# Altium PCB PCB.PcbDoc
Units mil, origin at the board's own origin, x right, y up, seen from the top; angles counter-clockwise.
Board outline 2700 x 1000 mil, 4 copper layers (L1, L2, L3, L4), stack 18.929 mil thick; 64 components, 76 nets, 299 pads, 83 vias.
Unrouted connection lines stored in the file: 45.
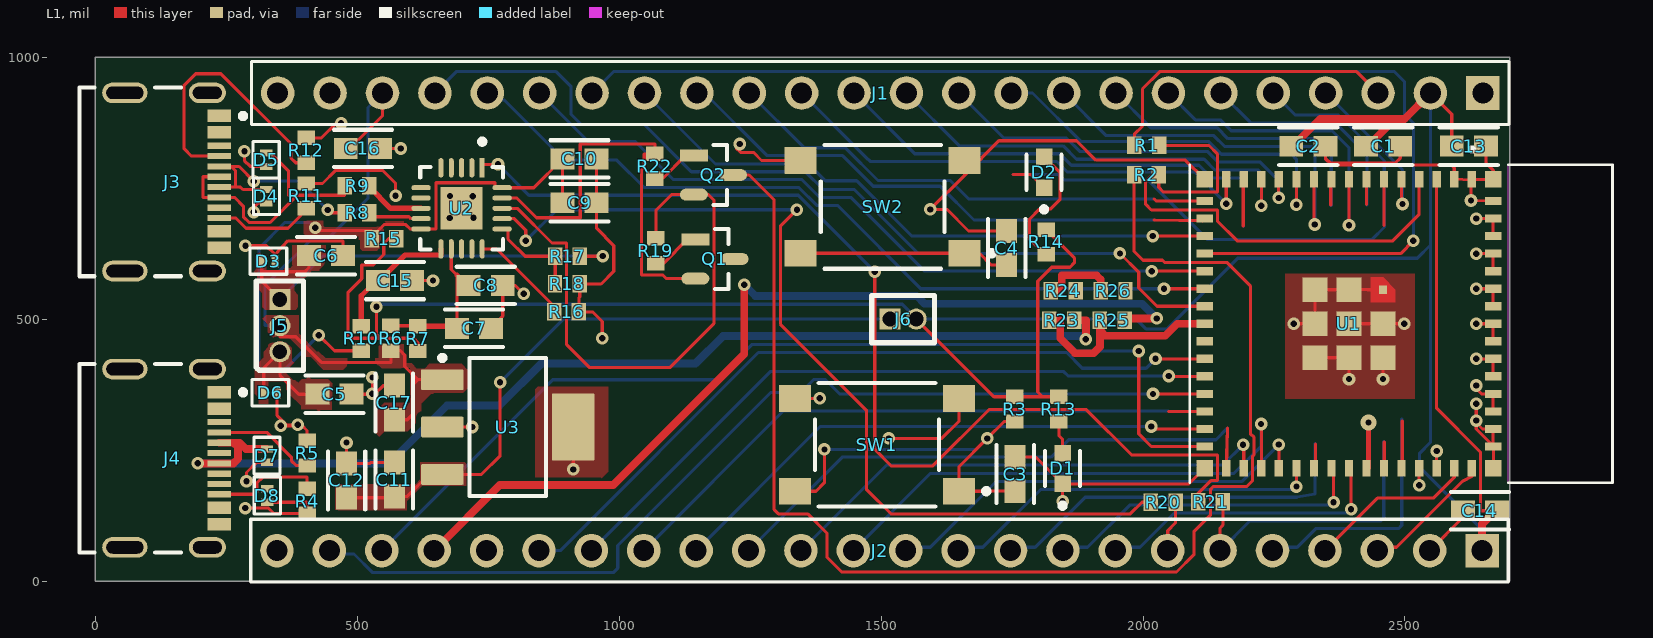
[diagram p0: L1 view]
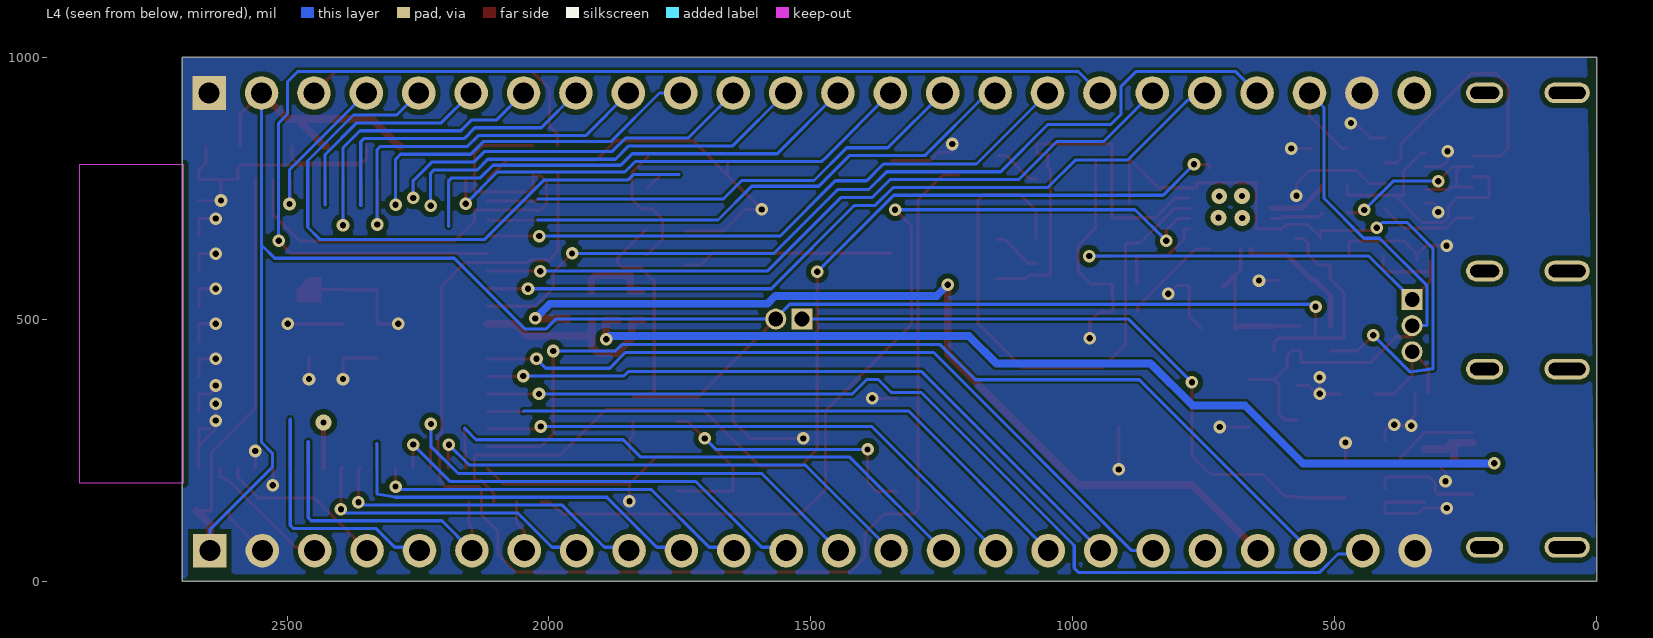
[diagram p1: L4 view, seen from below]
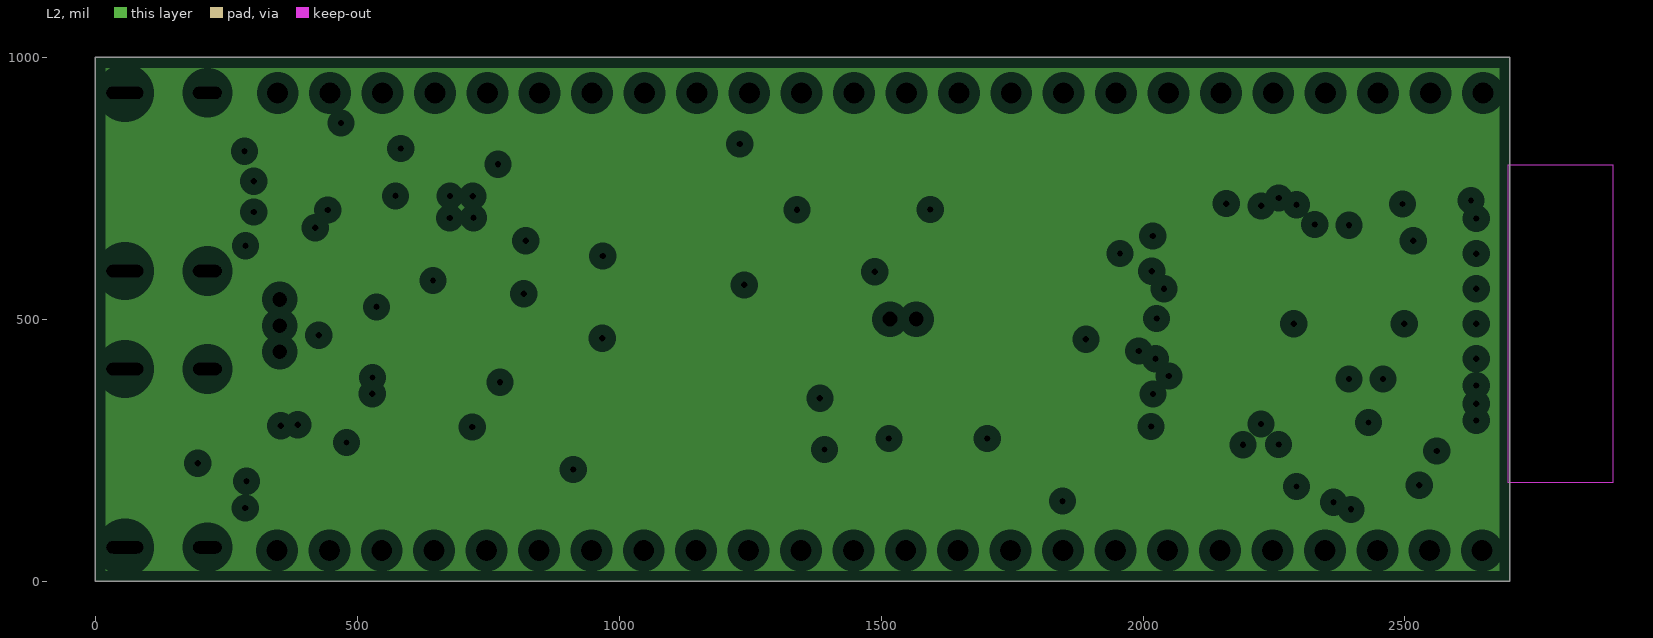
[diagram p2: L2, clearances drawn from the general rule]
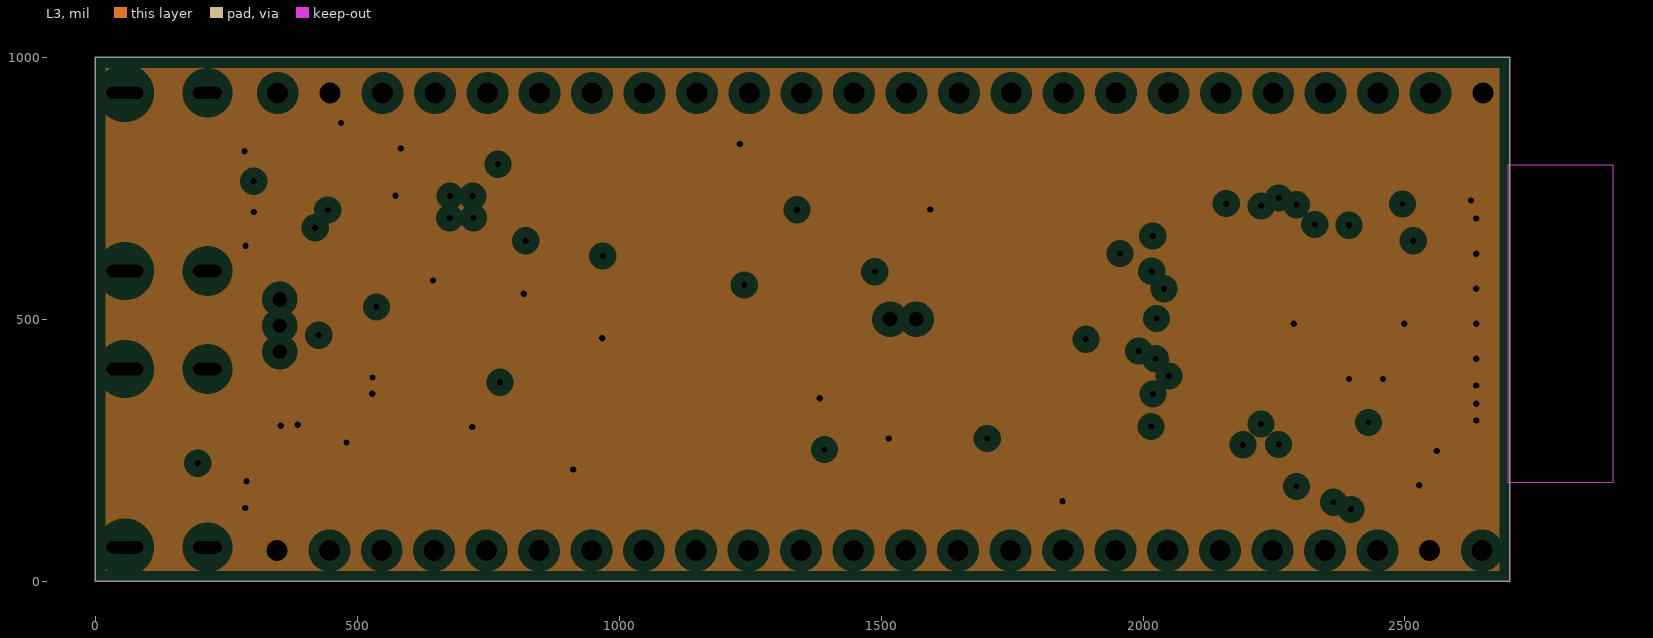
[diagram p3: L3, clearances drawn from the general rule]
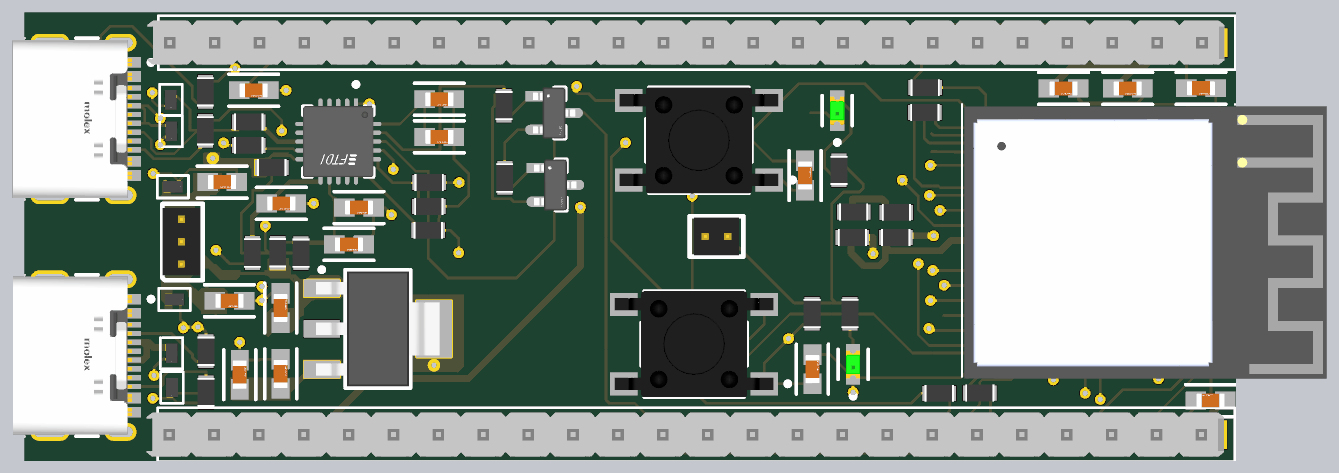
[diagram p4: 3D render of the assembled board from above, using the file's embedded part models]

## Layer stack, top to bottom
Top Solder: solder mask 1, SM-001, Dk 4
L1: signal copper 0.01
Dielectric 2: prepreg 2.8, PP-006, Dk 4.1
L2: plane copper 0.3543
Dielectric 1: dielectric 12.6, FR-4, Dk 4.8
L3: plane copper 0.3543, net GND
Dielectric 3: prepreg 2.8, PP-006, Dk 4.1
L4: signal copper 0.01
Bottom Solder: solder mask 1, SM-001, Dk 4

## Board outline
0,0 2700,0 2700,1000 0,1000

## Design rules (kind name [scope] priority, off if disabled: settings)
Clearance [All] p1: gap=10 ignorepadtopadclearanceinfootprint=FALSE except(5: Arc-Arc Arc-Track Arc-SMDPad Arc-THPad Arc-Via Arc-Fill Arc-Poly Arc-Region Arc-Text Arc-Hole Track-Track Track-SMDPad Track-THPad Track-Via Track-Fill Track-Poly Track-Region Track-Text Track-Hole; 6: SMDPad-SMDPad)
DiffPairsRouting [All] p1: maxlimit=10 minlimit=10 mostfreqgap=10 toplayer_minwidth=15 toplayer_maxwidth=15 toplayer_prefwidth=15 bottomlayer_minwidth=15 bottomlayer_maxwidth=15 bottomlayer_prefwidth=15 maxuncoupledlength=500
PlaneClearance [All] p1: clearance=20
PlaneConnect [All] p1: planeconnectstyle=Direct reliefexpansion=20 reliefentries=4 reliefconductorwidth=10 reliefairgap=10
PolygonConnect [All] p1: connectstyle=Direct reliefconductorwidth=10 reliefentries=4 polygonreliefangle="90 Angle" airgapwidth=10
RoutingVias [All] p1: holewidth=12 width=24 viastyle="Through Hole" minholewidth=12 minwidth=24 maxholewidth=12 maxwidth=24
SolderMaskExpansion [All] p1: expansion=2 istentingtop=FALSE
SupplyNets "Schematic Supply Nets" [InNet('+5V_VBUS2')] p1: voltage=0.000
SupplyNets "Schematic Supply Nets_5" [InNet('GND')] p2: voltage=0.000
SupplyNets "Schematic Supply Nets_4" [InNet('+5V')] p3: voltage=0.000
SupplyNets "Schematic Supply Nets_3" [InNet('+5V_VBUS1')] p4: voltage=0.000
SupplyNets "Schematic Supply Nets_2" [InNet('+3V3')] p5: voltage=0.000
SupplyNets "Schematic Supply Nets_1" [InNet('+3V3 REG')] p6: voltage=0.000
Width [All] p1: maxlimit=100 minlimit=6 preferedwidth=6
27 further rules are at their usual default settings.

## Classes and differential pairs
differential pair class DIFF90: CON2_USB CON_ESP_USB ESP_USB
differential pair CON_ESP_USB: +CON_ESP_USB_P -CON_ESP_USB_N
differential pair CON2_USB: +CON2_USB_P -CON2_USB_N
differential pair ESP_USB: +ESP_USB_P -ESP_USB_N

## Components (designator, comment, footprint, x,y, rotation, side; value= is the part's Value field where it differs from the comment)
C1 "10uF,50V" FP-CL10-0_1-IPC_A 2458.43,830.52 r0 top value=100nF
C2 "10uF,50V" FP-CL10-0_1-IPC_A 2315.49,830.52 r0 top value=100nF
C3 "1u,35V" FP-CL10-0_1-IPC_A 1755.97,204.96 r90 top value=100nF
C4 "100nF,50V" FP-CL10-0_1-IPC_A 1739.78,636.29 r90 top value=100nF
C5 "100nF,50V" FP-CL10-0_1-IPC_A 456.93,357.38 r0 top value=100nF
C6 "100nF,50V" FP-CL10-0_1-IPC_A 440.75,621.79 r0 top value=100nF
C7 "4u7,16V" FP-CL10-0_1-IPC_A 723.23,483.08 r0 top value=100nF
C8 "100nF,50V" FP-CL10-0_1-IPC_A 745.57,564.91 r0 top value=100nF
C9 "100nF,50V" FP-CL10-0_1-IPC_A 924.6,722.65 r0 top value=100nF
C10 "100nF,50V" FP-CL10-0_1-IPC_A 924.6,806.33 r0 top value=100nF
C11 "10uF,10V" FP-CL10-0_1-IPC_A 571.17,194.48 r90 top value=100nF
C12 "10uF,10V" FP-CL10-0_1-IPC_A 479.91,192.69 r90 top value=100nF
C13 "100nF,50V" FP-CL10-0_1-IPC_A 2621.73,830.77 r0 top value=100nF
C14 "100nF,50V" FP-CL10-0_1-IPC_A 2642.91,134.83 r180 top value=100nF
C15 "100nF,50V" FP-CL10-0_1-IPC_A 572.57,574.25 r0 top value=100nF
C16 "100nF,50V" FP-CL10-0_1-IPC_A 511.02,826.29 r0 top value=100nF
C17 "4u7,16V" FP-CL10-0_1-IPC_A 571.17,341.22 r90 top value=100nF
D1 "GREEN" FP-LTST-C190GKT-MFG 1846.5,215.55 r90 top
D2 "RED" FP-LTST-C190GKT-MFG 1811.15,780.97 r90 top
D3 "AQ3045-01ETG" SOD882 330.93,611.4 r180 top
D4 "AQ3045-01ETG" SOD882 327.03,735.24 r90 top
D5 "AQ3045-01ETG" SOD882 326.57,804.93 r90 top
D6 "AQ3045-01ETG" SOD882 334.7,360.15 r180 top
D7 "AQ3045-01ETG" SOD882 328.16,240.22 r90 top
D8 "AQ3045-01ETG" SOD882 328.84,164.01 r90 top
J1 "22-28-4245" "HDR_1X24_2.54MM - DUPLICATE" 2648.58,932.18 r270 top
J2 "22-28-4245" "HDR_1X24_2.54MM - DUPLICATE" 2647.16,58.78 r270 top
J3 "217179-0001" FP-2171790001-MFG 102.11,762.49 r270 top
J4 "217179-0001" FP-2171790001-MFG 102.16,235.2 r270 top
J5 "FTS-103-01-F-S" "HDR_1X3_1.27MM - duplicate" 352.72,538.22 r0 top
J6 "FTS-102-01-F-S" HDR_1X2_1.27MM 1517.15,500.73 r90 top
Q1 "SS8050-G" FP-SS8050-G-IPC_B 1183.13,615.44 r0 top
Q2 "SS8050-G" FP-SS8050-G-IPC_B 1180.21,775.71 r0 top
R1 "27R" RESC1609X50X30LL8T20 2007.1,832.09 r0 top
R2 "27R" RESC1609X50X30LL8T20 2006.5,776.6 r0 top
R3 "10K" RESC1609X50X30LL8T20 1755.24,328.91 r90 top
R4 "5K1" RESC1609X50X30LL8T20 404.74,153.25 r90 top
R5 "5K1" RESC1609X50X30LL8T20 404.55,244.91 r270 top
R6 "0R" RESC1609X50X30LL8T20 564.64,464.27 r90 top
R7 "0R" RESC1609X50X30LL8T20 616.2,463.47 r90 top
R8 "0R" RESC1609X50X30LL8T20 499.9,703.71 r0 top
R9 "0R" RESC1609X50X30LL8T20 499.9,755.46 r0 top
R10 "0R" RESC1609X50X30LL8T20 507.99,463.76 r90 top
R11 "5K1" RESC1609X50X30LL8T20 403.26,735.86 r270 top
R12 "5K1" RESC1609X50X30LL8T20 403.26,822.78 r270 top
R13 "1K" RESC1609X50X30LL8T20 1839.56,328.91 r90 top
R14 "1K" RESC1609X50X30LL8T20 1815.01,647.86 r90 top
R15 "0R" RESC1609X50X30LL8T20 551.29,654.31 r180 top
R16 "10K" RESC1609X50X30LL8T20 899.84,514.48 r0 top
R17 "4K7" RESC1609X50X30LL8T20 901.75,620.64 r0 top
R18 "4K7" RESC1609X50X30LL8T20 901.43,567.72 r180 top
R19 "10K" RESC1609X50X30LL8T20 1070.46,630.98 r90 top
R20 "0R" RESC1609X50X30LL8T20 2038.46,151.18 r180 top
R21 "0R" RESC1609X50X30LL8T20 2128.93,151.79 r180 top
R22 "10K" RESC1609X50X30LL8T20 1068.51,792.22 r90 top
R23 "0R" RESC1609X50X30LL8T20 1844.98,498.56 r180 top
R24 "0R" RESC1609X50X30LL8T20 1847.63,555.02 r180 top
R25 "0R" RESC1609X50X30LL8T20 1941.48,498.56 r180 top
R26 "0R" RESC1609X50X30LL8T20 1942.92,554.42 r180 top
SW1 "PTS645SH50SMTR92LFS" FP-PTS645SH50SMTR92LFS-MFG 1492.3,260.83 r180 top
SW2 "PTS645SH50SMTR92LFS" FP-PTS645SH50SMTR92LFS-MFG 1503.07,714.91 r180 top
U1 "ESP32-S3-MINI-1U-N8" XCVR_ESP32-S3-MINI-1-N8 2393.15,491.79 r270 top
U2 "FT231XQ-R" FP-QFN-20-IPC_A 699.46,712.05 r270 top
U3 "TL1963A-33DCYR" DCY0004A_M 787.7,294.69 r0 top

## Footprints (in the part's own frame and the unit in brackets; to place one, negate y for a bottom-side part, rotate by r counter-clockwise, add the part's x,y. Pads: shape width x height; smd on the part's side, far side on the other; paste and mask are expansions set on the pad)
DCY0004A_M [mm] "SOT223, 4-Leads, Body 6.7x3.7mm, Pitch 2.3mm, IPC Low Density"
  rrect10% 2.05x1 smd: 1(-3.175,2.3) 2(-3.175,0) 3(-3.175,-2.3)
  rrect5% 2.05x3.25 smd: 4(3.175,0)
  silkscreen extent -3.3,-3.35 1.85,3.47, body extent -3.5,-3.25 3.5,3.25, height 1.62
FP-2171790001-MFG [mm]
  rrect100% 1x1.8 hole 1.4 slot 0.6 at 0 deg paste-2539.97 mask+0: 1(-4.32,2.85) 2(4.32,2.85)
  rrect100% 1x2.2 hole 1.8 slot 0.6 at 0 deg paste-2539.97 mask+0: 3(-4.32,-1.15) 4(4.32,-1.15)
  rect 0.6x1.15 smd paste+0 mask+0: A1-B12(-3.2,3.425) A4-B9(-2.4,3.425) B1-A12(3.2,3.425) B4-A9(2.4,3.425)
  rect 0.3x1.15 smd paste+0 mask+0: A5(-1.25,3.425) A6(-0.25,3.425) A7(0.25,3.425) A8(1.25,3.425) B5(1.75,3.425) B6(0.75,3.425) B7(-0.75,3.425) B8(-1.75,3.425)
  silkscreen extent -4.57,-3.35 4.57,4.7, body extent -4.92,-3.45 4.92,4.1, height 0.25
FP-CL10-0_1-IPC_A [mil]
  rect 45.6x39.85 smd paste+0 mask+0: 1(-32.56,0) 2(32.56,0)
  silkscreen extent -55,-36 55,36, body extent -75,-40 75,40, height 10
FP-LTST-C190GKT-MFG [mm]
  rect 0.8x0.8 smd paste+0 mask+0: 1(-0.75,0) 2(0.75,0)
  silkscreen extent -1.92,-0.85 0.85,0.85, body extent -1.25,-0.55 1.25,0.55, height 0.25
FP-PTS645SH50SMTR92LFS-MFG [mm]
  rect 1.55x1.3 smd paste+0 mask+0: 1(-3.975,2.25) 2(3.975,2.25) 3(-3.975,-2.25) 4(3.975,-2.25)
  silkscreen extent -5.43,-3 3,3, body extent -4.85,-3.1 4.85,3.1, height 0.25
FP-QFN-20-IPC_A [mm]
  rect 0.94x0.242 smd paste+0 mask+0: 1(-1.965,1)
  rrect100% 0.94x0.242 smd paste+0 mask+0: 2(-1.965,0.5) 3(-1.965,0) 4(-1.965,-0.5) 5(-1.965,-1) 11(1.966,-1) 12(1.966,-0.5) 13(1.966,0) 14(1.966,0.5) 15(1.966,1)
  rrect100% 0.242x0.94 smd paste+0 mask+0: 6(-1,-1.966) 7(-0.5,-1.966) 8(0,-1.966) 9(0.5,-1.966) 10(1,-1.966) 16(1,1.966) 17(0.5,1.966) 18(0,1.966) 19(-0.5,1.966) 20(-1,1.966)
  rect 2.05x2.05 smd paste-1000 mask+0: 21(0,0)
  silkscreen extent -3.36,-2 2,2, body extent -2.94,-2.94 2.94,2.94, height 0.25
FP-SS8050-G-IPC_B [mm]
  rect 1.357x0.572 smd paste+0 mask+0: 1(-0.951,0.95)
  rrect100% 1.357x0.572 smd paste+0 mask+0: 2(-0.951,-0.95) 3(0.951,0)
  silkscreen extent 0,-1.45 0.65,1.45, body extent -1.88,-1.7 1.88,1.7, height 0.25
HDR_1X2_1.27MM [mil]
  rect 40x40 hole 28: 1(0,0)
  round 40 hole 28: 2(0,-50)
  silkscreen extent -45,-85 45,35, body extent -42,-75 43,25, height 154
"HDR_1X3_1.27MM - duplicate" [mil]
  rect 40x40 hole 28: 1(0,0)
  round 40 hole 28: 2(0,-50) 3(0,-100)
  silkscreen extent -45,-135 45,35, body extent -45,-124 40,26, height 154
"HDR_1X24_2.54MM - DUPLICATE" [mil]
  rect 64x64 hole 40: 1(0,0)
  round 64 hole 40: 2(0,-100) 3(0,-200) 4(0,-300) 5(0,-400) 6(0,-500) 7(0,-600) 8(0,-700) 9(0,-800) 10(0,-900) 11(0,-1000) 12(0,-1100) 13(0,-1200) 14(0,-1300) 15(0,-1400) 16(0,-1500) 17(0,-1600) 18(0,-1700) 19(0,-1800) 20(0,-1900) 21(0,-2000) 22(0,-2100) 23(0,-2200) 24(0,-2300)
  silkscreen extent -60,-2350 60,50, body extent -49,-2375 49,25, height 165
RESC1609X50X30LL8T20 [mm] "Chip Resistor, 2-Leads, Body 1.65x0.95mm, IPC High Density"
  rect 0.7x0.85 smd: 1(-0.6,0) 2(0.6,0)
  body extent -0.82,-0.48 0.82,0.48, height 0.5
SOD882 [mm]
  rect 0.35x0.6 smd: 1(-0.325,0) 2(0.325,0)
  silkscreen extent -0.89,-0.64 0.89,0.64, body extent -0.55,-0.33 0.55,0.33, height 0.56
XCVR_ESP32-S3-MINI-1-N8 [mm]
  rect 0.8x0.4 smd: 1(-7,5.95) 2(-7,5.1) 3(-7,4.25) 4(-7,3.4) 5(-7,2.55) 6(-7,1.7) 7(-7,0.85) 8(-7,0) 9(-7,-0.85) 10(-7,-1.7) 11(-7,-2.55) 12(-7,-3.4) 13(-7,-4.25) 14(-7,-5.1) 15(-7,-5.95) 31(7,-5.95) 32(7,-5.1) 33(7,-4.25) 34(7,-3.4) 35(7,-2.55) 36(7,-1.7) 37(7,-0.85) 38(7,0) 39(7,0.85) 40(7,1.7) 41(7,2.55) 42(7,3.4) 43(7,4.25) 44(7,5.1) 45(7,5.95)
  rect 0.4x0.8 smd: 16(-5.95,-7) 17(-5.1,-7) 18(-4.25,-7) 19(-3.4,-7) 20(-2.55,-7) 21(-1.7,-7) 22(-0.85,-7) 23(0,-7) 24(0.85,-7) 25(1.7,-7) 26(2.55,-7) 27(3.4,-7) 28(4.25,-7) 29(5.1,-7) 30(5.95,-7) 46(5.95,7) 47(5.1,7) 48(4.25,7) 49(3.4,7) 50(2.55,7) 51(1.7,7) 52(0.85,7) 53(0,7) 54(-0.85,7) 55(-1.7,7) 56(-2.55,7) 57(-3.4,7) 58(-4.25,7) 59(-5.1,7) 60(-5.95,7)
  rect 1.2x1.2 smd: 61(0,0) 67(0,1.65) 68(1.65,1.65) 69(-1.65,0) 70(1.65,0) 71(-1.65,-1.65) 72(0,-1.65) 73(1.65,-1.65)
  rect 0.8x0.8 smd: 62(-7,7) 63(-7,-7) 64(7,-7) 65(7,7)
  rect 0.4x0.4 smd paste-1 mask+0: 66(-1.65,1.65)
  L1 region: -1.05,1.05 -2.25,1.05 -2.25,1.65 -1.65,2.25 -1.05,2.25
  Keep-Out Layer region: 7.7,7.725 -7.7,7.725 -7.7,12.775 7.7,12.775
  Keep-Out Layer region: 7.7,7.725 -7.7,7.725 -7.7,12.775 7.7,12.775
  silkscreen extent -8.55,-7.72 7.7,12.78, body extent -7.57,-7.58 7.83,12.92, height 2.55

## Part data
C1 C2 C3 C4 C5 C6 C7 C8 C9 C10 C11 C12 C13 C14 C15 C16 C17: library part CMP-13271-000011-1, "CAP CER 0.1UF 50V X7R 0603", Capacitance=100nF, Manufacturer="Samsung Electro-Mechanics America, Inc", Manufacturer Part Number=CL10B104JB8NNNC, Package=CL10-0.1, Temperature="-55°C to +125°C", Temperature Characteristic=X7R, Temperature Coefficient=15%, Temperature Range High=+125°C, Temperature Range Low=-55°C, Tolerance=5%, Voltage Rating=50V, Automotive=No, Category=Cap, ComponentLink2Description=Datasheet, ComponentLink2URL=http://www.samsungsem.com/kr/support/product-search/mlcc/__icsFiles/afieldfile/2019/06/18/CL10B104JB8NNNC-19.pdf, Device Class L1="Passive Components", Device Class L2=Capacitors, Device Class L3="Ceramic Capacitors", Digikey Description="CAP CER 0.1UF 50V X7R 0603", Height=0.9mm, Ipc Land Pattern Name=CAPC16080X80, Lead Free=Yes, Material=Ceramic, Octopart=https://octopart.com/cl10b104jb8nnnc-samsung-9302151, RoHS=TRUE
D1 D2: library part CMP-22017-000005-2, "LED GREEN CLEAR CHIP SMD", Case Code (Imperial)=0603, Case Code (Metric)=1608, Color=Green, Forward Current=30mA, Forward Voltage=2.1V, Lens Color=Colorless, Max Operating Temperature=85°C, Min Operating Temperature=-55°C, Package Quantity=1, Power Dissipation=100mW, Reverse Voltage=5V, Test Current=10mA, Voltage=2V, Case/Package=0603, Depth=0.8mm, Dominant Wavelength=569nm, Height=0.8mm, Illumination Color=Green, Lead Free="Lead Free", Length=1.6mm, Lens Style=Clear, Lens Transparency=Clear, Luminous Intensity=6mcd, Mount="Surface Mount", Number of Elements=1, Number of LEDs=1, Number of Pins=2, Packaging="Tape and Reel", Power Rating=100mW, Radiation Hardening=No, Viewing Angle=130°, Wavelength=565nm, Width=0.8mm
D3 D4 D5 D6 D7 D8: "TVS DIODE 12VC 3A SOD882 / ESD Suppressor TVS Bi-Dir 5.3V Automotive 2-Pin SOD-882 T/R", Leakage Current=100nA, Manufacturer=Littelfuse, Max Operating Temperature=150°C, Min Breakdown Voltage=6.8V, Min Operating Temperature=-55°C, Operating Supply Voltage=5.3V, Peak Pulse Current=3A, Peak Pulse Power=40W, Power Line Protection=No, Supplier Part Number=F9321DKR-ND, Category="TVS Diodes", ComponentLink1Description=https://www.littelfuse.com/~/media/electronics/datasheets/tvs_diode_arrays/littelfuse_tvs_diode_array_aq3045_datasheet.pdf.pdf?src-supplier=Digikey, ComponentLink1URL=https://www.littelfuse.com/~/media/electronics/datasheets/tvs_diode_arrays/littelfuse_tvs_diode_array_aq3045_datasheet.pdf.pdf?src-supplier=Digikey, ComponentLink2Description=http://www.littelfuse.com/~/media/electronics/datasheets/tvs_diode_arrays/littelfuse_tvs_diode_array_aq3045_datasheet.pdf.pdf?src-supplier=Digikey, ComponentLink2URL=http://www.littelfuse.com/~/media/electronics/datasheets/tvs_diode_arrays/littelfuse_tvs_diode_array_aq3045_datasheet.pdf.pdf?src-supplier=Digikey, Diode Type=ZENER, Manufacturer Part Number=AQ3045-01ETG, Mounting Technology="Surface Mount", Number of Bidirectional Channels=1, Number of Channels=1NUMBER, Packaging="Cut Tape", Pricing="1=0.45, 10=0.29, 100=0.141, 500=0.134, 1000=0.131 (USD)", Reverse Standoff Voltage=5.3V, RoHS=Yes, RoHS Compliant=Yes, Series="Automotive, AEC-Q101, AQ3045, SPA®", Stock=7460, Supplier=Digikey
J1 J2: "Conn Unshrouded Header HDR 24 POS 2.54mm Solder ST Thru-Hole KK® Bag", Current Rating=4A, Housing Color=Black, Manufacturer=Molex, Supplier Part Number=900-0022284245-ND, Category="Headers and Wire Housings", ComponentLink1Description=https://datasheet.ciiva.com/6814/022284363-sd-6814049.pdf?src-supplier=Digikey, ComponentLink1URL=https://datasheet.ciiva.com/6814/022284363-sd-6814049.pdf?src-supplier=Digikey, ComponentLink2Description=https://datasheet.ciiva.com/10075/0022284245-pcb-headers-10075617.pdf?src-supplier=Avnet, ComponentLink2URL=https://datasheet.ciiva.com/10075/0022284245-pcb-headers-10075617.pdf?src-supplier=Avnet, ComponentLink3Description=https://datasheet.ciiva.com/1433/1597854-1433759.pdf?src-supplier=Element14, ComponentLink3URL=https://datasheet.ciiva.com/1433/1597854-1433759.pdf?src-supplier=Element14, Contact Material=Brass, Contact Plating=Gold, Gender=Male, Lead Free="Lead Free", Manufacturer Part Number=22-28-4245, Mounting Technology="Through Hole", Number of Circuits=24, Number of Contacts=24, Number of Positions=24, Number of Rows=1, Orientation=Vertical, Packaging=Bulk, Pitch=2.54mm, Plating=Tin, Pricing="1=1.21, 10=1.024, 100=0.8699, 500=0.77638, 1000=0.73932, 5000=0.65998, 10000=0.62851 (USD)", Reach SVHC Compliant=4188SVHC, RoHS=No, Stock=1547, Supplier=Digikey, Termination=Solder
J3 J4: "USB Connector, USB Type C, USB 2.0, Receptacle, 16 Ways, Surface Mount, Through Hole Mount", Current Rating=1.25A, Manufacturer=Molex, Max Operating Temperature=85°C, Min Operating Temperature=-40°C, Supplier Part Number=900-2171790001CT-ND, Voltage Rating=30V, Category=Connectors, Contact Material=Nickel,Gold, Gender=Receptacle, Height=3.36mm, Manufacturer Part Number=217179-0001, Number of Contacts=16, Pricing="1=0.83, 10=0.704, 25=0.6596, 50=0.628, 100=0.598, 250=0.56052, 500=0.53374 (USD)", RoHS=No, Stock=19280, Supplier=Digikey, USB Standard="USB 2.0"
J5: "Pin Header, Wire-to-Board, 1.27 mm, 1 Rows, 3 Contacts, Through Hole, FTS", Manufacturer=Samtec, Supplier Part Number=612-FTS-103-01-F-S-ND, Category=Connectors, ComponentLink1Description=http://www.samtec.com/documents/webfiles/pdf/FTS.pdf?src-supplier=Avnet, ComponentLink1URL=http://www.samtec.com/documents/webfiles/pdf/FTS.pdf?src-supplier=Avnet, ComponentLink2Description=http://suddendocs.samtec.com/prints/fts-1xx-xx-xx-xx-xx-mkt.pdf?src-supplier=Digikey, ComponentLink2URL=http://suddendocs.samtec.com/prints/fts-1xx-xx-xx-xx-xx-mkt.pdf?src-supplier=Digikey, ComponentLink3Description=https://datasheet.octopart.com/FTS-103-01-F-S-Samtec-datasheet-116535195.pdf?src-supplier=Toby+Electronics, ComponentLink3URL=https://datasheet.octopart.com/FTS-103-01-F-S-Samtec-datasheet-116535195.pdf?src-supplier=Toby+Electronics, ComponentLink4Description=https://datasheet.octopart.com/FTS-103-01-F-S-Samtec-datasheet-151470456.pdf?src-supplier=Sager+Electronics, ComponentLink4URL=https://datasheet.octopart.com/FTS-103-01-F-S-Samtec-datasheet-151470456.pdf?src-supplier=Sager+Electronics, ComponentLink5Description=https://datasheet.octopart.com/FTS-103-01-F-S-Samtec-datasheet-118493358.pdf?src-supplier=Electro+Sonic, ComponentLink5URL=https://datasheet.octopart.com/FTS-103-01-F-S-Samtec-datasheet-118493358.pdf?src-supplier=Electro+Sonic, Gender=29Gender, Manufacturer Part Number=FTS-103-01-F-S, Pricing="1=0.73, 50=0.6378, 100=0.5407, 500=0.4491, 1000=0.384 (USD)", RoHS=Yes, Supplier=Digikey
J6: "Pin Header, Board-to-Board, 1.27 mm, 1 Rows, 2 Contacts, Through Hole Straight, FTS Series", Flammability Rating="UL94 V-0", Insulation Color=Black, Manufacturer=Samtec, Max Operating Temperature=125°C, Min Operating Temperature=-55°C, Supplier Part Number=SAM15176-ND, Category=Connectors, ComponentLink1Description=http://www.samtec.com/documents/webfiles/pdf/FTS.pdf?src-supplier=Avnet, ComponentLink1URL=http://www.samtec.com/documents/webfiles/pdf/FTS.pdf?src-supplier=Avnet, ComponentLink2Description=https://datasheet.octopart.com/FTS-102-01-F-S-Samtec-datasheet-118493358.pdf?src-supplier=Electro+Sonic, ComponentLink2URL=https://datasheet.octopart.com/FTS-102-01-F-S-Samtec-datasheet-118493358.pdf?src-supplier=Electro+Sonic, Contact Finish - Mating=GOLD, Contact Material=Bronze, Contact Plating=Gold, Contact Shape=Square, Contact Type="Male Pin", Fastening Type=Pull, Gender=Male, Insulation Material=Polymer, Manufacturer Part Number=FTS-102-01-F-S, Mounting Technology="Through Hole", Number of Contacts=2, Number of Positions=2, Number of Rows=1, Packaging=Bulk, Pitch=1.27mm, Pricing="1=0.49, 50=0.4252, 100=0.3608, 500=0.2994, 1000=0.25609, 2000=0.252 (USD)", Radiation Hardening=No, RoHS=Yes, RoHS Compliant=Yes, Series=FTS, Stock=35, Supplier=Digikey, Termination=Solder
Q1 Q2: library part CMP-20235-000001-1, "NPN TRANSISTOR 1.5A 40V SOT-23 R", Case/Package=TO-236-3, Collector Emitter Breakdown Voltage=25V, Collector Emitter Voltage (VCEO)=400mV, Max Collector Current=1.5A, Max Power Dissipation=300mW, Transition Frequency=100MHz, Max Breakdown Voltage=25V, Mount="Surface Mount", Packaging="Tape and Reel", RoHS Compliant=Yes
R1 R2 R3 R4 R5 R6 R7 R8 R9 R10 R11 R12 R13 R14 R15 R16 R17 R18 R19 R20 R21 R22 R23 R24 R25 R26: library part CMP-1666-00005-4, "Chip Resistor, 10 KOhm, +/- 1%, 100 mW, -55 to 155 degC, 0603 (1608 Metric), RoHS, Tape and Reel", Manufacturer="Vishay Semiconductor", Max Operating Temperature="155 degC", Min Operating Temperature="-55 degC", Package Quantity=5000, Voltage Rating="75 V", ComponentLink1Description="Manufacturer URL", ComponentLink1URL=http://www.vishay.com/, ComponentLink2Description=Datasheet, ComponentLink2URL=https://datasheet.ciiva.com/11809/0900766b80d98afc-11809037.pdf, DatasheetVersion=06/2012, Height="0.45 mm", Length="1.55 mm", Mounting Technology="Surface Mount", PackageDescription="2-Pin Surface Mount Device, Body 1.575 x 0.85 mm", PackageReference=0603, Packaging="Tape and Reel", REACH SVHC=Unknown, RoHSCompliant=true
SW1 SW2: library part CMP-10040-000028-1, "SWITCH TACTILE SPST-NO 0.05A 12V", Case/Package=SMD/SMT, Color=Black, Current Rating=50mA, Max Operating Temperature=60°C, Max Voltage Rating (DC)=12V, Min Operating Temperature=-20°C, Operating Force=200gf, Package Quantity=1000, Actuator Material=Nylon, Actuator Type=Standard, Contact Material=Bronze, Contact Plating=Silver, Depth=9mm, Illumination Type=Non-Illuminated, Lead Free="Lead Free", Length=6mm, Max Current Rating=50mA, Mechanical Life=100000Cycles, Mount="Surface Mount", Orientation=Straight, Packaging="Tape and Reel", REACH SVHC="No SVHC", Switch Function=Off-Mom, Termination="Gull Wing", Throw Configuration=SPST, Voltage Rating (DC)=12V
U1: "WiFi-Module 802.11 2, 4GHz 150Mb/s", Manufacturer="Espressif Systems", Supplier Part Number=1965-ESP32-S3-MINI-1U-N8CT-ND, Category=LDO, ComponentLink1Description=https://datasheet.octopart.com/ESP32-S3-MINI-1U-N8-Espressif-Systems-datasheet-165560562.pdf?src-supplier=TME, ComponentLink1URL=https://datasheet.octopart.com/ESP32-S3-MINI-1U-N8-Espressif-Systems-datasheet-165560562.pdf?src-supplier=TME, Manufacturer Part Number=ESP32-S3-MINI-1U-N8, Pricing="1=5.28, 10=4.566, 25=4.3196, 100=3.9802, 250=3.7768 (USD)", RoHS=No, Stock=576, Supplier=Digikey
U2: library part CMP-0248-00001-3, "IC USB SERIAL FULL UART 20QFN", Case/Package=QFN, Max Operating Temperature=85°C, Max Supply Voltage=5.5V, Min Operating Temperature=-40°C, Min Supply Voltage=2.97V, Operating Supply Current=8mA, Package Quantity=5000, Data Rate=12Mbps, Interface=UART, Lead Free="Lead Free", Mount="Surface Mount", Number of Channels=1, Number of Pins=20, Packaging="Tape and Reel", Weight=0.004339oz
U3: library part CMP-0395-00535-2, "Single Output Low Noise LDO, 1.5 A, Fixed 3.3 V Output, 2.1 to 20 V Input, 4-pin SOT-223 (DCY), -40 to 125 degC, Green (RoHS & no Sb/Br)", Manufacturer="Texas Instruments", Accuracy(%)=3, Code_JEDEC=TO-261, ComponentLink1Description="Manufacturer URL", ComponentLink1URL=http://www.ti.com/, ComponentLink2Description=Datasheet, ComponentLink2URL=http://www.ti.com/general/docs/lit/getliterature.tsp?genericPartNumber=TL1963A-33&fileType=pdf, ComponentLink3Description="Package Specification", ComponentLink3URL=http://www.ti.com/litv/pdf/mpds094a, DatasheetVersion=SLVS719F, Eco-Plan="Green (RoHS & no Sb/Br)", Fixed Output Options(V)=3.3, Iout(Max)(A)=1.5, Iq(Typ)(mA)=1, Mounting Technology="Surface Mount", PackageDescription="4-Pin Plastic Small Outline, Body 3.5 x 6.5 mm, Pitch 2.3 mm", PackageReference=DCY0004A, PackageVersion=4202506/B, PartNumber=TL1963A-33DCYR, SubFamily="Single Channel LDO", Vdo(Typ)(mV)=340, Vin(Max)(V)=20, Vin(Min)(V)=2.1, Vout Adj(Max)(V)=3.3, Vout Adj(Min)(V)=3.3

## Via types
v1: diameter 24, hole 12, L1 to L4, 78 vias
v2: diameter 30, hole 12, L1 to L4, 5 vias

## Nets (pads, with @x,y where several pads share a name; then routed paths per layer and width w, separated by ;. In a path a pad name is that pad's centre, name@x,y a point inside that pad or via, vN(x,y) a via of type N, cw(c..) or ccw(c..) an arc to the next point about the centre after c; other vN are vias at no path point)
+3V3: C1.1 C2.1 C13.1 C14.1 J1.2 J2.1 J6.2 R3.2 R7.1 R13.2 R14.2 R15.1 U1.3 | length 5514.1
  L1 w6: v1(537,524) 537,472 545,464 ; R15.1 560,654.31 551,645.31 551,624 531,604 509,604 509,578 483,552 483,464 545,464 ; R7.1 616.2,456 608.2,464 545,464 ; J6.2 1715.34,352.53 R3.2 1808,352.53 ; R14.2 1869,617.5 1869,608 1860.76,599.76 1825.76,599.76 1799,573 1799,361.53 1808,352.53 ; R13.2 1808,352.53 ; J1.2 2589.17,891.59 C13.1 ; U1.3 2560.47,330.53 2644,247 2644,134.83 2672.6,134.83 C14.1
  L1 w15: C2.1 2285.8,830.52 2338.16,882.87 2481.1,882.87 ; C1.1 2428.74,830.52 2481.1,882.87 ; J1.2 2499.28,882.87 2481.1,882.87 ; J2.1 2647.16,109.39 C14.1@2672.6,134.83
  L4 w6: v1(537,524) 541.91,528.91 1540.67,528.91 1567.15,502.44 J6.2 1986.84,500.73 2005.57,482 2046,482 2180.78,616.78 2523.32,616.78 2548.58,642.05 ; J1.2 2548.58,642.05 ; J2.1 2647.16,99 2528,218.16 2528,245 2548.58,265.58 2548.58,642.05
"+3V3 REG": C11.1 C12.1 J6.1 U3.3 | length 1260.1
  L1 w6: C12.1@480.27,159.77 569.02,159.77 C11.1 595,161.92 637.22,204.14 U3.3 737.14,204.14 773,240 v1(773,380)
  L4 w6: v1(773,380) 893.73,500.73 J6.1
+3V3_FTDI: C9.1 C10.1 R10.1 R15.2 U2.10 U2.20 | length 1305.7
  L1 w6: v1(420,675) 425,670 527.67,670 R15.2@527.67,657.27 ; v1(427,470) 456.86,440.14 R10.1 ; R15.2 R15.2@527.67,657.27 ; C9.1 892,742.95 892.05,743 C10.1 837.14,751.42 U2.20 763,751.42 763,761 651,761 651,672.68 U2.10 601.2,672.68 592.84,681.05 551.45,681.05 R15.2@527.67,657.27
  L4 w6: v1(420,675) 410,685 362,685 313,636 313,406 357,400 v1(427,470)
+5V: C16.1 C17.1 J1.22 J5.2 R6.1 U3.1 | length 1242.1
  L1 w6: J5.2 352.72,467 383,467 432,418 564.64,418 R6.1 582.35,440.65 591,432 591,410.24 616,385.24 ; C16.1 486.29,826.29 548.58,888.58 J1.22 ; C17.1 595.66,308.66 607,320 607,376.24 616,385.24 ; U3.1 616,385.24
  L4 w6: J5.2 324,488.22 324,564 415,655 445.03,655 521,730.97 521,904.6 J1.22
+5V_VBUS1: C6.1 D3.2 J5.1 R17.2 | length 897.9
  L1 w6: D3.2 318.13,591 ; J5.1 318.13,572.8 318.13,591 ; C6.1 408.19,599.19 400,591 318.13,591 ; R17.2 968.64,620.64 v1(969,621)
  L4 w6: J5.1 435.5,621 v1(969,621)
+5V_VBUS2: C5.1 D6.2 J5.3 | length 222.1
  L1 w6: D6.2 321.9,407.4 J5.3 352.72,393.66 389,357.38 C5.1
"BTN GPIO0": C4.1 SW2.1 SW2.2 | length 402.6
  L1 w6: SW2.2 SW2.1 1688,626.33 1710.6,603.73 C4.1
BTN_GPIO0: Q2.3 R2.1 | length 2577
  L1 w6: Q2.3 1248.29,775.71 1296,728 1296,137 1304,129 1360,129 1397,92 1397,46 1425,18 2064,18 2097,51 2097,95 2129,127 2129,176 2134.45,181.45 2198.45,181.45 2209,192 2209,239 2212,242 2212,275 2205,282 2205,564 2160,609 2041,609 2037,613 2000,613 1982.88,630.12 R2.1
"CHIP _PU": Q1.3
"CHIP PU": C3.1 R3.1 SW1.1 SW1.2 | length 742.2
  L1 w6: SW1.2 1376,172.25 1392,188.25 v1(1392,252) ; R3.1 1735,305.29 v1(1702.71,273) 1648.8,219.09 SW1.1 1702,172.25 1702.15,172.4 C3.1
  L4 w6: v1(1392,252) 1681.71,252 v1(1702.71,273)
CHIP_PU: J2.3 U1.45 | length 253.4
  L1 w6: J2.3 2453.56,65.18 2483.84,65.18 2610.66,192 2627.4,200 U1.45
CON1_USB-N: D4.2 J3.A7 J3.B7 R8.1 | length 410.6
  L1 w6: J3.A7 268,752.65 ; J3.B7 259.98,792.02 ; v1(303.02,764) 275,792.02 259.98,792.02 ; D4.2 282,748.04 277.39,752.65 268,752.65 ; v1(444,709) 449.29,703.71 R8.1 ; 259.98,792.02 268,784 268,752.65
  L4 w6: v1(303.02,764) 389,764 v1(444,709)
CON1_USB-P: D5.2 J3.A6 J3.B6 R9.1 | length 532.4
  L1 w6: J3.A6 206,772.33 206,732.96 J3.B6 266,732.96 283,715.96 283,696 294,685 334,685 386,737 ; D5.2 335,817.72 369,783.72 369,737 386,737 ; R9.1 476.27,737 386,737
CON2_USB_N: D7.2 J4.A7 J4.B7 R23.1 | length 2067.9
  L1 w15: v1(196,225.36) J4.A7 264,225.36 273,234.36 273,256 264.27,264.73 ; J4.B7 264.27,264.73 ; D7.2 287.72,253.01 276,264.73 264.27,264.73 ; R23.1 1891,498.56 v1(1891,462)
  L4 w15: v1(196,225.36) 561.36,225.36 672,336 772,336 852,416 1146,416 1198.23,468.23 1884.77,468.23 v1(1891,462)
CON2_USB_P: D8.2 J4.A6 J4.B6 R24.1
CON_ESP_USB_N: J2.21 R25.1 | length 1757.1
  L1 w15: J2.21 772.38,184 989,184 1239,434 v1(1239,566) ; R25.1 1965.1,502 v1(2026,502)
  L4 w15: v1(1239,566) 1260,545 1568,545 1583,530 1998,530 v1(2026,502)
CON_ESP_USB_P: J2.20 R26.1
CON_GPIO0: J1.3 R1.1 | length 594.5
  L1 w6: R1.1 1983.48,853.48 1999,869 1999,940 2032,973 2407.76,973 J1.3
DTR_FTDI: Q2.2 R19.2 U2.18 | length 1095.7
  L1 w6: U2.18 806,712.05 872.05,646 900,646 900,452 944,408 1097,408 1181,492 1181,728 1170.69,738.31 Q2.2 1100,738.31 1070.46,708.76 R19.2
ESP_USB_N: R23.2 R25.2 U1.23 | length 411.9
  L1 w15: R23.2 1842,498.56 1842,464 1870.5,435.5 1905.36,435.5 1917.86,448 1917.86,479.14 ; R25.2 1917.86,479.14 ; U1.23 2065.24,491.79 2042.45,469 1928,469 1917.86,479.14
ESP_USB_P: R24.2 R26.2 U1.24 | length 149.5
  L1 w15: R24.2 1844.97,555.02 1844.97,584.26 1911.05,584.26 1919.3,576 R26.2
FTDI_USB-N: R8.2 U2.9 | length 103.3
  L1 w6: R8.2 531.19,696.05 599.05,696.05 602.72,692.37 U2.9
FTDI_USB-P: R9.2 U2.8 | length 118.3
  L1 w10: R9.2 523.52,752.51 563.97,712.05 U2.8
GND: C1.2 C2.2 C3.2 C4.2 C5.2 C6.2 C7.2 C8.2 C9.2 C10.2 C11.2 C12.2 C13.2 C14.2 C15.2 C16.2 C17.2 D1.1 D3.1 D4.1 D5.1 D6.1 D7.1 D8.1 J1.1 J1.23 J2.2 J2.24 R4.1 R5.1 R11.1 R12.1 R16.2 R18.1 SW1.3 SW1.4 SW2.3 SW2.4 U1.1 U1.2 U1.42 U1.43 U1.46 U1.47 U1.48 U1.49 U1.50 U1.51 U1.52 U1.53 U1.54 U1.55 U1.56 U1.57 U1.58 U1.59 U1.60 U1.61 U1.62 U1.63 U1.64 U1.65 U1.66 U1.67 U1.68 U1.69 U1.70 U1.71 U1.72 U1.73 U3.2 U3.4 | length 5720.1
  L1 w6: v1(285,821) 285,803.13 296,792.13 D5.1 ; v1(286.51,140) 331,140 341.37,129.63 R4.1 404.74,151.21 D8.1 ; v1(286.93,640.71) 327.02,640.71 343.72,624 ; v1(289,191) 289,208 308.42,227.42 D7.1 ; v1(303,705) 303,713.45 312,722.45 D4.1 ; D3.1 343.72,624 ; D6.1 347.5,316.52 365.17,298.84 v1(386.7,298.84) ; v1(354.31,296.91) 395.63,296.91 404.55,288 R5.1 ; R11.1 434.14,759.48 459.14,784.48 548.5,784.48 573.5,759.48 v1(573.5,735.86) ; R12.1 431.63,846.4 460.01,874.78 v1(469.5,874.78) ; C6.2 473.31,650 368,650 343.72,624 ; v1(479.91,265.05) C12.2 524.21,225.25 526,227.04 C11.2 ; C5.2 520,357.38 529.29,366.67 v1(529.29,389.38) ; v1(529,358) 534.22,358 550,373.78 C17.2 ; C16.2 v1(583.38,826.29) ; C15.2 v1(644.93,574.25) ; U3.2 v1(720.06,294.69) ; C7.2 755.79,484 778.13,506.35 C8.2 801.93,564.91 v1(817.93,548.91) ; v1(912.7,213.71) U3.4 ; C10.2 957,806.33 957,722.65 C9.2 957.16,673.84 990,641 990,592 965.72,567.72 R18.1 925.06,543 923.46,541.41 R16.2 949.36,514.48 967.84,496 v1(967.84,464.25) ; v1(1230.56,834.91) 1224,834.91 1224,826.91 1232,818.91 1256.53,818.91 1271.95,803.5 SW2.4 ; SW1.4 v1(1383.32,349.41) ; v1(1515,273) 1616,273 1648.8,305.8 SW1.3 ; SW2.3 1659.57,775.57 ; C4.2 1667,668.85 1625.85,710 v1(1594,710) 1659.57,775.57 ; C3.2 1795.01,237.52 D1.1 ; v1(1846.5,153.28) D1.1 ; U1.64 2087.39,186.03 D1.1 ; U1.63 2080.93,804 1910,804 1873,841 1725,841 1659.57,775.57 ; v1(2287.56,491.79) U1.72 2328,491.97 2328,556.56 U1.71 U1.69 2393.15,557 2428.75,557 2429,556.75 U1.66 ; U1.73 U1.70 v1(2393.15,386.2) ; C2.2 2348.05,808 ; U1.61 U1.67 v1(2498.73,491.79) ; v1(2458.11,386.2) U1.68 ; C1.2 2490.98,808 2480.98,798 2358.05,798 2348.05,808 ; v1(2527.01,183.45) U1.42 ; J2.2 2610.35,121.97 C14.2 ; U1.43 v1(2560.47,248.94) ; U1.2 U1.2@2593.93,768 ; v1(2626,727) v1@2626,727.1 ; v1(2636,307) v1@2636,303 ; v1(2635.99,339) v1@2635.99,303.01 ; v1(2635.99,373.93) 2635.99,368 2646.06,357.93 U1.49@2668,357.93 ; v1(2635.99,424.86) U1.51@2668,424.86 ; v1(2635.99,491.79) U1.53@2668,491.79 ; v1(2635.99,558.71) U1.55@2668,558.71 ; v1(2635.99,625.64) U1.57@2668,625.64 ; v1(2635.99,692.57) U1.59@2668,692.57 ; C13.2 2654.29,799 2668.74,784.55 U1.62 U1.1 U1.1@2626,765.98 ; U1.65 U1.46 ; U1.47 U1.47@2668,291 ; U1.48 2668,324.46 U1.49@2668,357.93 ; U1.49 U1.49@2668,357.93 ; U1.50 2668,391.39 U1.51@2668,424.86 ; U1.51 U1.51@2668,424.86 ; U1.52 2668,458.32 U1.53@2668,491.79 ; U1.53 U1.53@2668,491.79 ; U1.54 2668,525.25 U1.55@2668,558.71 ; U1.55 U1.55@2668,558.71 ; U1.56 2668,592.18 U1.57@2668,625.64 ; U1.57 U1.57@2668,625.64 ; U1.58 2668,659.11 U1.59@2668,692.57 ; U1.59 U1.59@2668,692.57 ; U1.60 v1@2626,727.1 ; 2348.05,808 2348.05,806.95 2360,795 2587.93,795 2593.93,789 U1.2@2593.93,768 ; U1.2@2593.97,768 U1.1@2626,765.98 ; v1@2626,727.1 U1.1@2626,765.98 ; v1@2636,303 2648,291 U1.47@2668,291 ; v1@2636,303 2636,291 U1.46@2668,259 ; U1.46@2668,259 U1.47@2668,291 ; U1.46@2668,259 2668,257.53 U1.46 ; U1.46@2668,259 2668.74,258.26 U1.46
GPIO0: R1.2 R2.2 U1.4 | length 1054.9
  L1 w6: R2.2 R2.2@2030.12,774 ; R1.2 2125.91,832.09 2142,816 2142,743 2039.12,743 2030.12,752 R2.2@2030.12,774 ; U1.4 2527.01,700.47 2476.53,650 2180,650 2142,688 2142,709 2016,709 2005,720 2005,763 2016,774 R2.2@2030.12,774
GPIO1: J1.4 U1.5 | length 320.5
  L1 w6: U1.5 2493.54,722.04 v1(2495.3,720.28)
  L4 w6: J1.4 2495.3,785.46 v1(2495.3,720.28)
GPIO2: D2.1 J1.5 U1.6 | length 1442.4
  L1 w6: 1752.13,776.37 1786.23,776.37 D2.1 ; 2460.08,679.73 U1.6
  L4 w6: 1752.13,776.37 1838.93,776.37 1848.93,766.37 2009.25,766.37 2122.74,652.87 2437.43,652.87 2460.96,676.4 2460.96,802.43 2460.08,803.31 ; J1.5 2290.58,890.18 2373.21,890.18 2460.08,803.31 ; 2460.08,679.73 2460.08,803.31
GPIO3: J1.6 U1.7 | length 473.5
  L1 w6: 2426.6,719.1 2426.6,765.31 U1.7
  L4 w6: J1.6 2205.58,875.18 2366.99,875.18 2427.48,814.69 2427.48,718.22 2426.6,719.1
GPIO4: J1.7 U1.8 | length 623.5
  L1 w6: U1.8 2393.15,679.83 v1(2393.22,679.76)
  L4 w6: J1.7 2099.95,880.81 2147.66,880.81 2168.29,860.18 2360.78,860.18 2393.22,827.74 v1(2393.22,679.76)
GPIO5: J1.8 U1.9 | length 621.9
  L1 w6: 2358.37,718.12 2358.37,764.33 U1.9
  L4 w6: J1.8 2014.95,865.81 2141.44,865.81 2162.08,845.18 2353.28,845.18 2359.25,839.2 2359.25,717.24 2358.37,718.12
GPIO6: J1.9 U1.10 | length 754
  L1 w6: U1.10 2326.22,682.93 v1(2327.94,681.2)
  L4 w6: J1.9 1929.95,850.81 2135.23,850.81 2155.86,830.18 2322.08,830.18 2327.94,824.32 v1(2327.94,681.2)
GPIO7: J1.10 U1.11 | length 732.2
  L1 w6: v1(2292.75,718.75) U1.11
  L4 w6: J1.10 1789.19,932.18 1881.94,839.43 2125.4,839.43 2149.65,815.18 2283.37,815.18 2292.75,805.8 v1(2292.75,718.75)
GPIO8: J1.11 U1.12 | length 748.9
  L1 w6: v1(2259.23,732) 2258.35,732.88 2258.35,765.9 U1.12
  L4 w6: J1.11 1734.4,846.37 1853.79,846.37 1879.34,820.81 2122.8,820.81 2143.44,800.18 2224,800.18 2259.23,764.95 v1(2259.23,732)
GPIO9: J1.12 U1.13 | length 853.7
  L1 w6: v1(2225.82,716.75) U1.13
  L4 w6: J1.12 1649.4,831.37 1847.57,831.37 1873.13,805.81 2116.59,805.81 2137.22,785.18 2219.89,785.18 2225.82,779.25 v1(2225.82,716.75)
GPIO10: J1.13 U1.14 | length 988.7
  L1 w6: 2191.42,678.29 2191.42,765.9 U1.14
  L4 w6: J1.13 1564.4,816.37 1841.36,816.37 1863.3,794.43 2106.76,794.43 2131.01,770.18 2185.64,770.18 2191.49,764.32 2191.49,677.87 2191.42,678.29
GPIO11: J1.14 U1.15 | length 943.8
  L1 w6: v1(2158.9,721.08) U1.15
  L4 w6: J1.14 1471,809.77 1480.42,801.37 1835.15,801.37 1855.15,781.37 2098.61,781.37 v1(2158.9,721.08)
GPIO12: J1.15 U1.16 | length 954.4
  L1 w6: 2021.13,729.9 2024.99,726.04 U1.16
  L4 w6: J1.15 1353.14,827.63 1431.92,827.63 1494.24,765.31 1632.05,765.31 1667.47,729.9 2021.13,729.9
GPIO13: J1.16 U1.17 | length 1071.1
  L1 w6: 2021.52,689.92 2023.15,689.92 2113.29,688.31 U1.17
  L4 w6: J1.16 1163.2,932.18 1282.75,812.63 1426.74,812.63 1485.05,754.31 1613.05,754.31 1677.44,689.92 2021.52,689.92
GPIO14: J1.17 U1.18 | length 1182.1
  L1 w6: v1(2018.61,659.11) U1.18
  L4 w6: J1.17 1183.99,796.77 1361.72,796.77 1393.72,764.77 1453.39,764.77 1559.04,659.11 v1(2018.61,659.11)
GPIO15: J1.18 U1.19 | length 2294.8
  L1 w6: U1.19 2491.64,625.64 v1(2516,650)
  L4 w6: J1.18 989.4,973 2480,973 2499,954 2499,892 2516,875 v1(2516,650)
GPIO16: J1.19 U1.20 | length 1409.8
  L1 w6: v1(2016.66,592.18) U1.20
  L4 w6: J1.19 941.06,839.7 1031.01,839.7 1103.94,766.77 1349.29,766.77 1383.44,732.63 1443.1,732.63 1583.55,592.18 v1(2016.66,592.18)
GPIO17: J1.20 U1.21 | length 1523.7
  L1 w6: v1(2040.12,558.71) U1.21
  L4 w6: J1.20 762.2,918.56 781.44,918.56 895.86,804.14 995.86,804.14 1048.23,751.77 1343.08,751.77 1377.22,717.63 1416.97,717.63 1575.89,558.71 v1(2040.12,558.71)
GPIO18: J1.21 U1.22 | length 1720
  L1 w6: v1(1956,626) 1992,590 1992,560 2026.75,525.25 U1.22
  L4 w6: J1.21 689.4,973 880,973 908,945 908,892 928,872 1048,872 1138,782 1355.41,782 1389.41,748 1449,748 1571,626 v1(1956,626)
GPIO21: J2.19 U1.25 | length 1446.9
  L1 w6: v1(2023.86,424.86) U1.25
  L4 w6: J2.19 887.78,58.78 1266,437 1854.18,437 1884.18,407 2006,407 v1(2023.86,424.86)
GPIO26: J2.18 U1.26 | length 1315.6
  L1 w6: v1(2049.41,392.02) 2050.03,391.39 U1.26
  L4 w6: J2.18 1288.72,400.34 1849.04,400.34 1857.36,392.02 v1(2049.41,392.02)
GPIO33: J2.17 U1.28 | length 1181.4
  L1 w6: 2048.74,324.46 U1.28
  L4 w6: J2.17 1313.98,325.6 2047.6,325.6 2048.74,324.46
GPIO34: J2.16 U1.29 | length 1070.4
  L1 w6: v1(2015.48,295.64) 2020.12,291 U1.29
  L4 w6: J2.16 1384.02,295.64 v1(2015.48,295.64)
GPIO35: J2.15 U1.31 | length 1086.7
  L1 w6: U1.31 2161.08,292.23
  L4 w6: J2.15 1425.71,237.32 1824.74,237.32 1857.97,270.55 2139.4,270.55 2161.08,292.23
GPIO36: J2.14 U1.32 | length 972.8
  L1 w6: v1(2191.01,260.86) 2192.36,259.52 U1.32
  L4 w6: J2.14 1510.71,222.32 2152.47,222.32 v1(2191.01,260.86)
GPIO37: J2.13 U1.33 | length 987.8
  L1 w6: v1(2225.36,300.54) 2225.82,300.07 U1.33
  L4 w6: J2.13 1594.53,206.15 2173.6,206.15 2225.36,257.91 v1(2225.36,300.54)
GPIO38: J2.12 U1.34 | length 840.9
  L1 w6: v1(2258.84,261.17) 2259.29,261.17 U1.34
  L4 w6: J2.12 1553.56,65.18 1594.16,65.18 1719.53,190.55 2188.22,190.55 v1(2258.84,261.17)
GPIO39: J2.11 U1.35 | length 731.4
  L1 w6: v1(2292.75,181.07) U1.35
  L4 w6: J2.11 1653.56,65.18 1694.16,65.18 1804.53,175.55 2287.23,175.55 v1(2292.75,181.07)
GPIO40: J2.10 U1.36 | length 771.2
  L1 w6: U1.36 2329.33,216.22 2329.33,262.44
  L4 w6: J2.10 1753.56,65.18 1794.16,65.18 1889.53,160.55 2293.68,160.78 2328.45,166.64 2328.45,263.32 2329.33,262.44
GPIO41: J2.9 U1.37 | length 622.9
  L1 w6: U1.37 2363.67,215.34 v1(2363.67,151.33)
  L4 w6: J2.9 1853.56,65.18 1894.16,65.18 1974.53,145.55 2357.89,145.55 v1(2363.67,151.33)
GPIO42: J2.8 U1.38 | length 566.7
  L1 w6: U1.38 2397.15,217.41 v1(2397.15,137.52)
  L4 w6: J2.8 1953.56,65.18 1994.16,65.18 2059.53,130.55 2390.17,130.55 v1(2397.15,137.52)
GPIO45: J2.5 U1.41 | length 563.4
  L1 w6: U1.41 2494.72,218.78 2494.72,306.42
  L4 w6: J2.5 2253.56,65.18 2294.16,65.18 2329.77,100.78 2487.7,100.78 2493.84,106.93 2493.84,309.76 2494.72,306.42
GPIO46: J2.4 U1.44 | length 322.1
  L1 w6: J2.4 2447.38,159 2554,159 2593.93,198.93 U1.44
GPIO47: J2.23 U1.27 | length 1877
  L1 w6: v1(2019.08,357.93) U1.27
  L4 w6: J2.23 453.56,52.39 494.16,52.39 529.77,16.78 988.86,16.78 997.47,25.39 997.47,68.49 1289.48,360.5 1346.72,360.5 1371.56,385.34 1393.44,385.34 1420.86,357.93 v1(2019.08,357.93)
GPIO48: J2.22 U1.30 | length 1906.5
  L1 w6: v1(1992,439.83) 1992,281.53 2016,257.53 U1.30
  L4 w6: J2.22 873.38,385 1186,385 1253,452 1861.18,452 1873.36,439.83 v1(1992,439.83)
NetC7_1: C7.1 C8.1 R6.2 R7.2 U2.12 | length 314.5
  L1 w6: R6.2 615.4,487.89 R7.2 ; U2.12 679.78,595.27 690.67,584.39 C7.1
  L1 w10: R7.2 686.66,487.09 C7.1 ; C8.1@690.67,584.39 710.14,564.91 C8.1
NetC15_1: C15.1 R10.2 U2.11 | length 253.6
  L1 w10: R10.2 507.99,545.1 537.14,574.25 C15.1 542.88,574.25 591.64,623.01 659.87,623.01 660.09,623.23 U2.11
NetD1_2: D1.2 R13.1 | length 63.1
  L1 w6: R13.1 1839.56,277.94 1846.5,271 D1.2
NetD2_2: D2.2 R14.1 | length 250.2
  L1 w6: D2.2 1841.9,779.75 1841.9,729.48 1822.9,710.48 1802.28,710.48 1783.28,691.48 1783.28,653.02 1812.06,624.24 R14.1
NetJ3_A5: J3.A5 R12.2 | length 522.7
  L1 w6: J3.A5 184,811.7 170,825.7 170,947 192,969 240,969 373.85,835.15 373.85,808 382.69,799.15 R12.2
NetJ3_B5: J3.B5 R11.2 | length 192.2
  L1 w6: J3.B5 268.41,693.59 288,674 368.26,674 403.26,709 R11.2
NetJ4_A5: J4.A5 R5.2 | length 197.6
  L1 w6: J4.A5 327.58,284.42 374.71,237.29 374.71,230.58 384,221.29 R5.2
NetJ4_B5: J4.B5 R4.2 | length 213.4
  L1 w6: J4.B5 304.31,166.31 309,171 309,188 320,199 404.74,199 R4.2
NetQ1_1: Q1.1 R19.1 | length 94.1
  L1 w6: R19.1 1085,607.36 1130.48,652.85 Q1.1
NetQ2_1: Q2.1 R22.1 | length 92.7
  L1 w6: R22.1 1083,768.6 1127.51,813.11 Q2.1
NetR16_1: R16.1 U2.15 | length 193.1
  L1 w6: U2.15 738.92,634.59 766.28,634.59 876.22,524.66 R16.1
RTS_FTDI: Q1.2 R22.2 U2.19 | length 826.5
  L1 w6: U2.19 804.82,731.74 842.56,694 926,694 926,835 1068.51,835 R22.2 1048,815.84 1048,791 1043,786 1043,585 1083.04,585 1090,578.04 Q1.2
RXD_FTDI: R21.2 U2.1 | length 2039.4
  L1 w6: U2.1 738.83,796 v1(769,796) ; v1(1488,591) 1488,252 1520,220 1598,220 1706,328 1892,328 1979,241 2142,241 2142,192.45 2129.45,192.45 2105.31,168.31 R21.2
  L4 w6: v1(769,796) 828,737 1342,737 v1(1488,591)
TXD_FTDI: R20.2 U2.17 | length 1802.8
  L1 w6: U2.17 800,692.37 822,670.37 v1(822,650) ; v1(1339.5,709.5) 1308,678 1308,491 1472,327 1472,176 1519,129 1975.82,129 1998,151.18 R20.2
  L4 w6: v1(822,650) 881.5,709.5 v1(1339.5,709.5)
U0RXD: J2.6 R21.1 U1.40 | length 629.6
  L1 w6: J2.6 2147.16,102 2152.55,107.39 R21.1 ; U1.40 2460.37,219.66 2460.37,265.87
  L4 w6: J2.6 2204.16,115.78 2453.64,115.78 2459.5,121.64 2459.5,266.75 2460.37,265.87
U0TXD: J2.7 R20.1 | length 98.6
  L1 w6: J2.7 2047.16,97 2062.09,111.92 R20.1
VBUS_SENSE: R17.1 R18.2 U2.16 | length 187.2
  L1 w6: U2.16 788,672.68 788,653.31 820.67,620.64 R17.1 878.13,568.04 R18.2
pads on no net: J1.24 J3.1 J3.2 J3.3 J3.4 J3.A1-B12 J3.A4-B9 J3.A8 J3.B1-A12 J3.B4-A9 J3.B8 J4.1 J4.2 J4.3 J4.4 J4.A1-B12 J4.A4-B9 J4.A8 J4.B1-A12 J4.B4-A9 J4.B8 U1.39 U2.2 U2.3 U2.4 U2.5 U2.6 U2.7 U2.13 U2.14 U2.21
copper on no net: | length 89.8
  L1 w10: 2430.6,215.34 v2@2430.6,302.96
  L4 w10: v2@2429.01,301.87 v2(2430.52,303.38)
  other v2: 677.02,693.62 722.19,693.95 677.52,735.46 720.7,735.13

## Polygon pours and split planes (outlines as drawn)
GND on L1 "GND_L01_P006" (solid, pour order 6): 845.87,372.1 846.78,371.19 979.31,371.19 979.31,209.62 966.6,196.91 964.78,198.72 840.42,198.72 840.42,366.66
GND on L1 "GND_L01_P005" (solid, pour order 5): 2277.17,587.87 2277.74,587.3 2519.05,587.3 2519.05,347.12 2517.91,348.26 2271.5,348.26 2271.5,587.87 2278.3,587.87
+5V_VBUS2 on L1 "+5V_VBUS2_L01_P004" (solid, pour order 4): 325.18,458.55 347.54,458.55 350.85,461.87 366.03,461.87 375.69,452.21 375.69,421.85 380.38,417.15 367.69,404.46 362.99,404.46 362.99,399.77 378.45,384.31 382.31,384.31 387.56,379.07 394.18,385.69 401.91,385.69 407.15,390.94 412.12,385.97 445.24,385.97 453.52,377.69 452.42,376.58 452.42,349.81 451.59,348.98 451.59,327.73 430.61,327.73 426.47,323.59 421.78,328.28 393.08,328.28 393.08,334.91 371.83,356.16 370.45,356.16 370.45,360.02 351.13,379.34 342.29,379.34 336.22,373.27 336.22,341.26 334.02,339.05 312.76,339.05 312.76,350.64 304.76,358.64 304.76,410.81 321.6,427.64 321.6,438.68 330.98,448.07 330.98,458.83 335.44,458.83 341.3,464.7
+5V_VBUS1 on L1 "+5V_VBUS1_L01_P003" (solid, pour order 3): 441.22,607.47 441.22,642.26 436.36,647.11 434.34,645.09 376.09,645.09 376.09,604.24 377.3,603.02 372.05,597.76 335.64,597.76 328.36,605.05 329.17,605.86 329.17,622.84 319.46,622.84 313.8,628.51 306.92,621.63 306.92,594.93 303.28,591.29 309.35,585.23 309.35,560.15 319.06,550.44 319.06,523.34 325.12,517.27 338.88,517.27 342.92,513.22 380.14,513.22 387.01,520.1 387.01,547.2 379.73,554.48 379.73,568.24 375.69,572.28 382.16,578.75 399.96,578.75 413.71,592.51 427.87,592.51 427.87,595.34 440,607.47 437.98,609.5 437.98,618.8
+5V on L1 "+5V_L01_P002" (solid, pour order 2): 328.65,509.26 323.7,512.01 388.61,512.01 388.61,473.5 423.27,438.84 427.12,438.84 439.77,426.19 541.54,426.19 541.54,458.46 546.86,453.14 591.05,453.14 591.05,428.94 613.61,406.38 629.01,406.38 637.81,415.19 699.97,415.19 712.63,402.53 712.63,370.08 702.72,360.18 647.16,360.18 644.96,357.98 641.11,357.98 641.11,357.42 622.96,339.27 622.96,312.32 597.1,286.46 553.09,286.46 542.64,276.01 533.29,285.36 533.29,322.77 551.44,340.92 551.44,349.17 594.35,349.17 595.45,350.27 594.9,350.82 594.9,396.48 584.45,406.94 547.59,406.94 541.54,412.99 482.68,412.99 473.88,404.18 435.92,404.18 411.17,428.94 397.41,428.94 397.41,438.29 370.46,465.25 341.85,465.25 340.75,464.15 329.75,475.15 329.75,490.55 318.75,501.55 326.45,509.26 326.45,511.46
+3V3_FTDI on L1 "+3V3_FTDI_L01_P001" (solid, pour order 1): 398.5,687.1 398.5,660.04 400.47,658.07 502.77,658.07 502.77,638.63 509.81,631.58 538.56,631.58 538.56,631.86 545.32,638.63 545.32,660.84 560.59,676.11 589,676.11 589,689.35 588.16,690.2 586.75,688.79 548.98,688.79 535.74,675.54 438.8,675.54 435.42,678.92 435.42,687.94 398.22,687.94 397.94,688.22
"+3V3 REG" on L1 "+3V3_REG_L01_P000" (solid, pour order 0): 458.22,185.96 611.9,185.96 620.6,194.66 620.6,227.77 705.22,227.77 708.23,224.76 708.23,182.95 624.61,182.95 594.51,152.85 594.51,135.46 458.89,135.46 458.05,136.29 458.22,136.46 458.22,186.13
GND on L4 "GND_L04_P007" (solid, pour order 7): 19.5,1000.31 20.96,998.85 2701.15,998.85 2701.15,5.1 2698.23,2.18 2686.53,13.87 1.96,13.87
no net on L2 (split plane): 2679.9,20.1 20.1,20.1 20.1,979.9 2679.9,979.9
GND on L3 (split plane): 2679.9,20.1 20.1,20.1 20.1,979.9 2679.9,979.9

## Text inside footprints (layer, text, board x,y; h text height)
J1: Top 3D Body "1" at 2611.69,1024.06 h60 r270
J2: Top 3D Body "1" at 2627.16,198.78 h60 r270
J5: Mechanical 1 "1" at 272.72,513.22 h60
J6: Mechanical 1 "1" at 1542.15,420.73 h60 r90